# Altium PCB I-V E9A_05_6231.PcbDoc
Units mil, origin at the board's own origin, x right, y up, seen from the top; angles counter-clockwise.
Board outline 6000 x 4000 mil, 2 copper layers (Top Layer, Bottom Layer); 21 components, 16 nets, 67 pads, 0 vias.
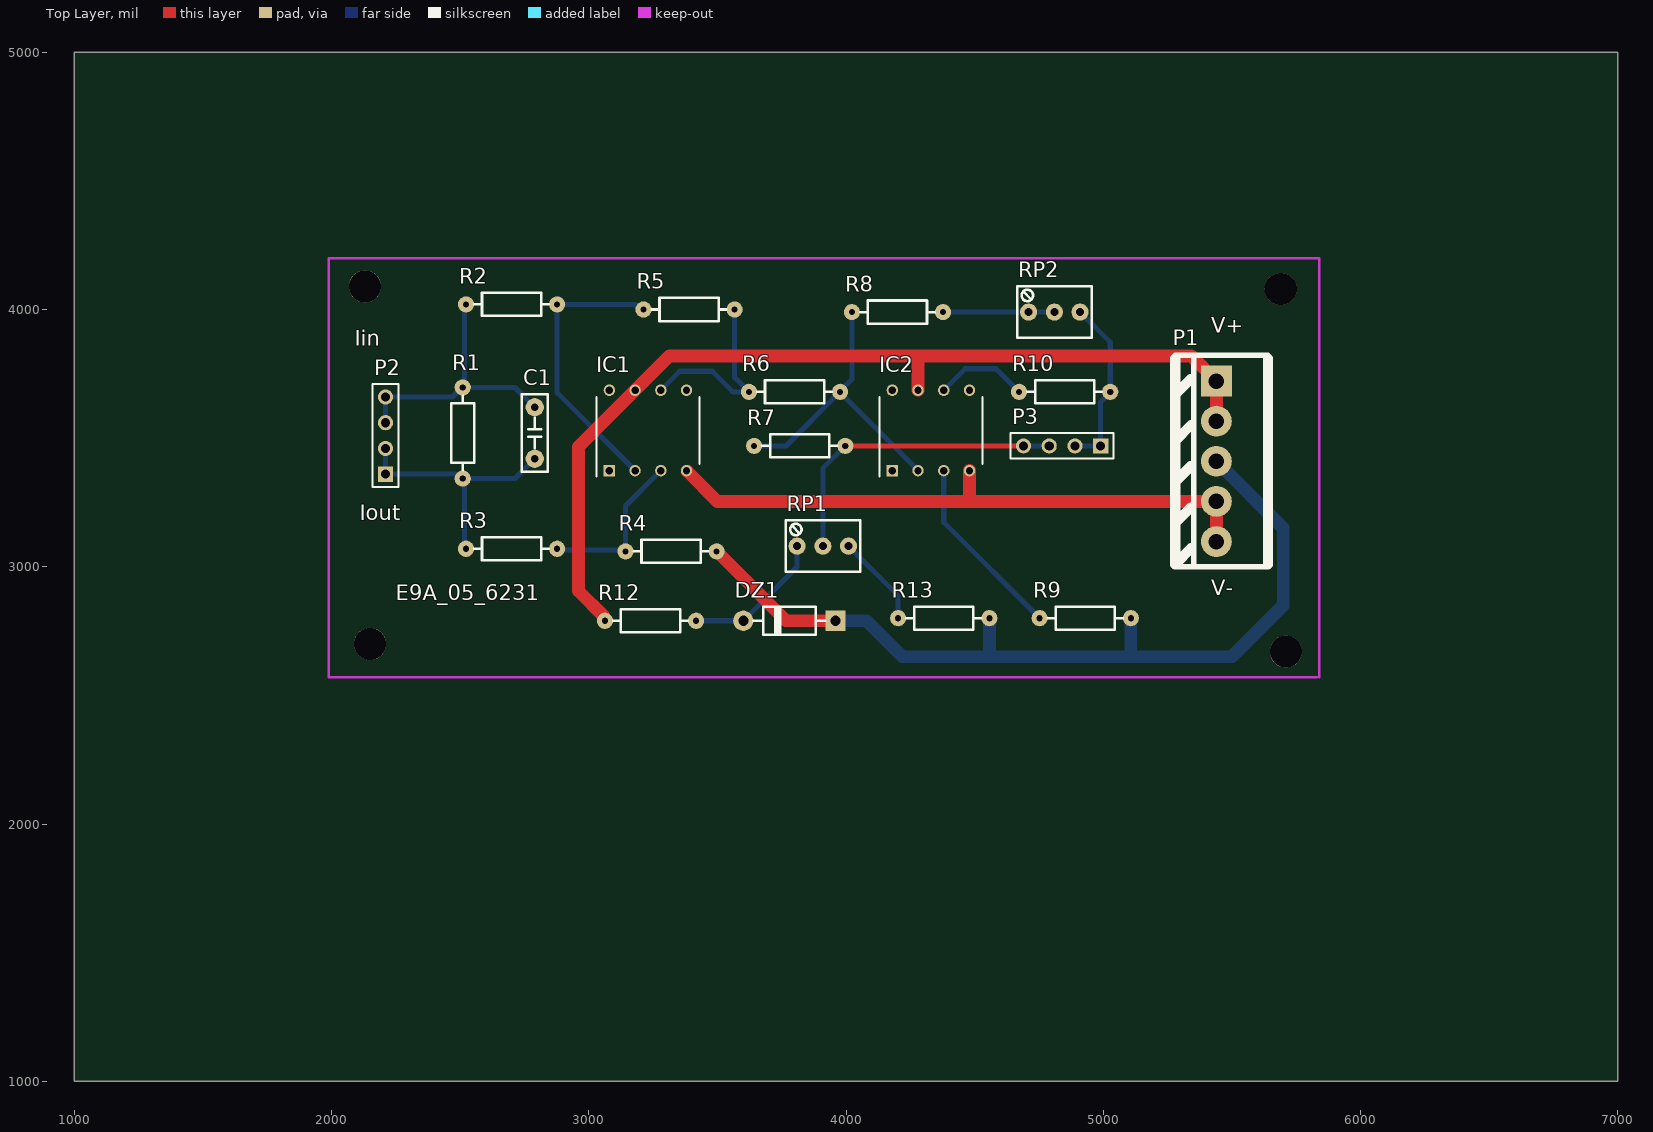
[diagram p0: Top Layer view]
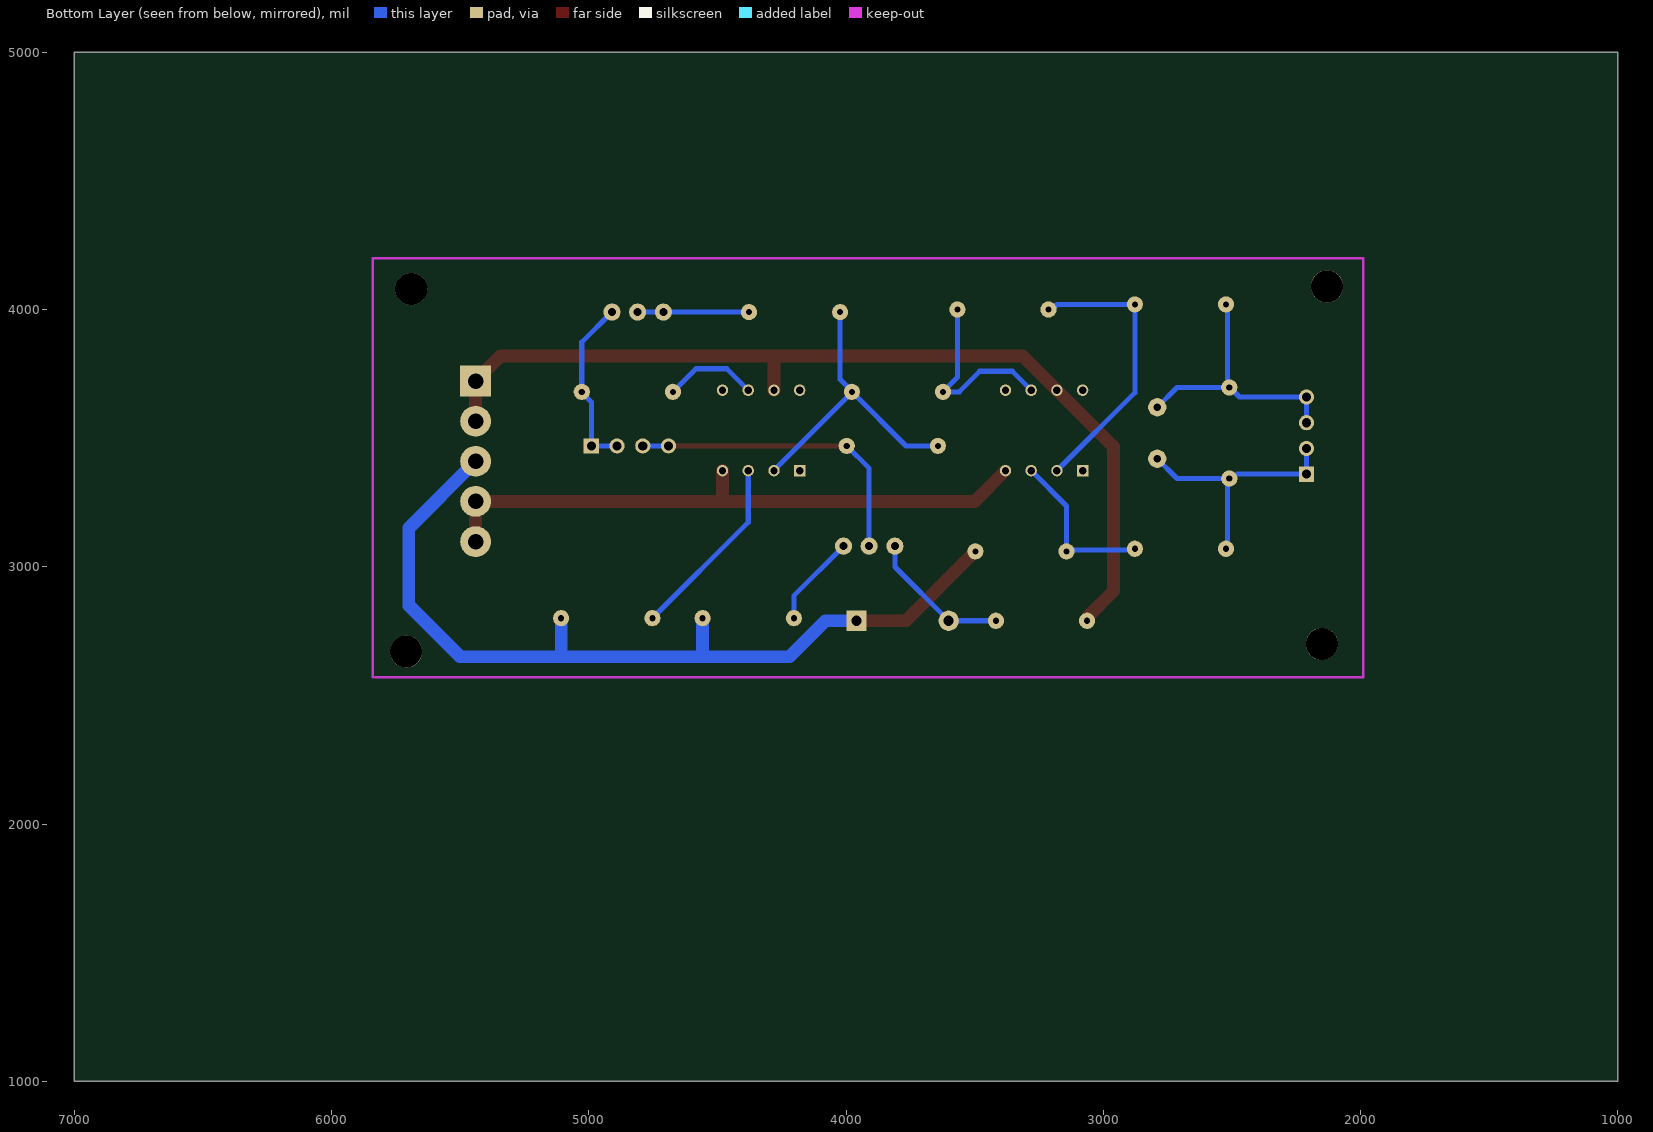
[diagram p1: Bottom Layer view, seen from below]
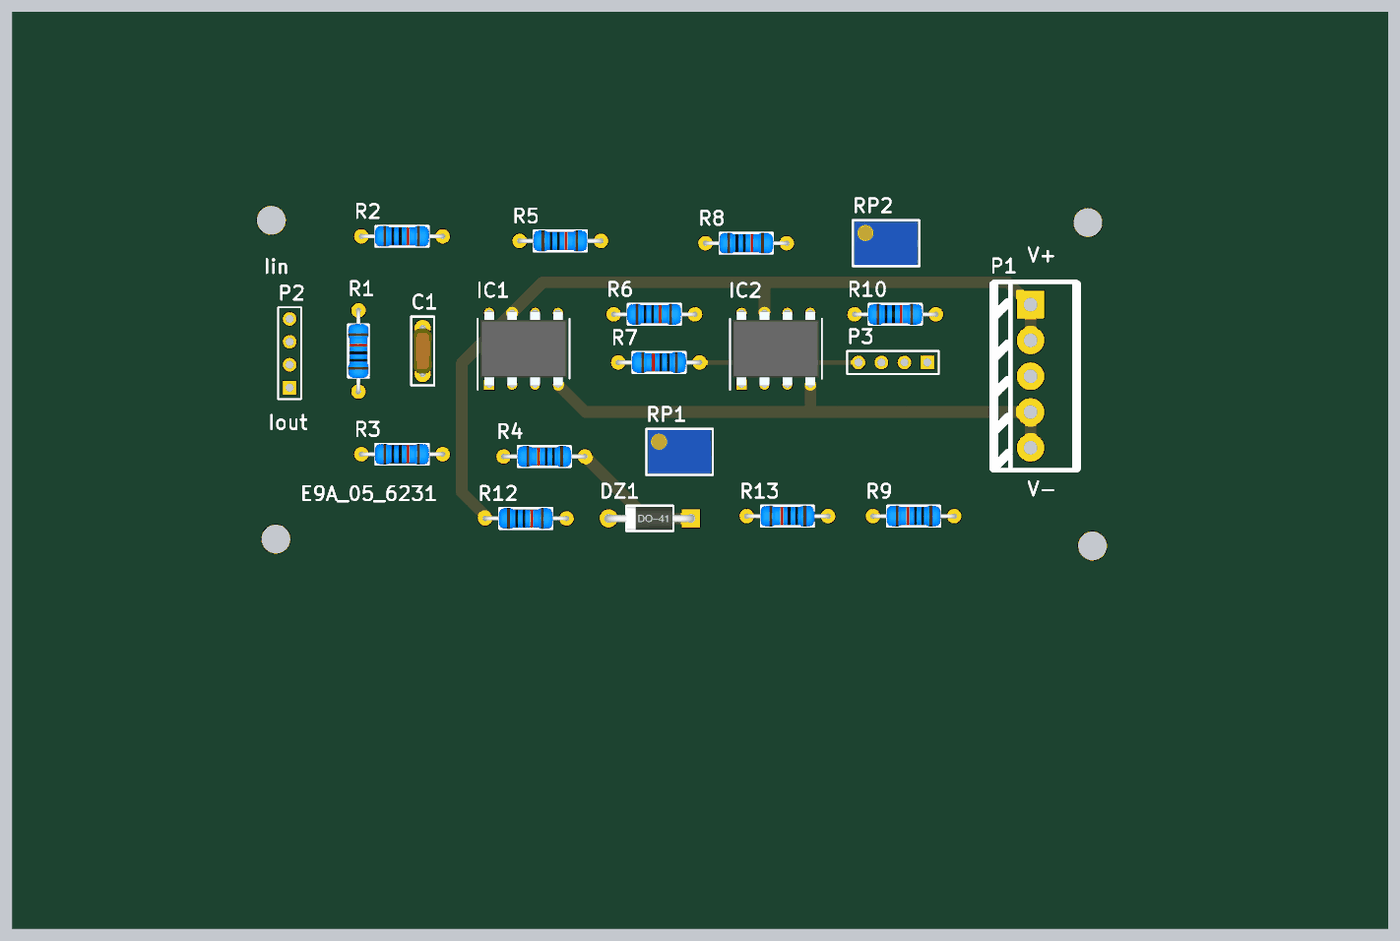
[diagram p2: 3D render of the assembled board from above, using the file's embedded part models]

## Layer stack, top to bottom
Top Solder: solder mask 0.4, Solder Resist, Dk 3.5
Top Layer: signal copper 1.4
Dielectric 1: dielectric 12.6, FR-4, Dk 4.8
Bottom Layer: signal copper 1.4
Bottom Solder: solder mask 0.4, Solder Resist, Dk 3.5

## Board outline
1000,1000 7000,1000 7000,5000 1000,5000

## Design rules (kind name [scope] priority, off if disabled: settings)
Clearance [All] p1: gap=10 ignorepadtopadclearanceinfootprint=FALSE except(0: Arc-Hole Track-Hole SMDPad-Hole THPad-Hole Via-Hole Fill-Hole Poly-Hole Region-Hole Text-Hole)
PolygonConnect [All] p1: connectstyle=Relief reliefconductorwidth=10 reliefentries=4 polygonreliefangle="90 Angle" airgapwidth=10
RoutingVias [All] p1: holewidth=28 width=50 viastyle="Through Hole" minholewidth=28 minwidth=50 maxholewidth=28 maxwidth=50
SolderMaskExpansion [All] p1: expansion=4 istentingtop=FALSE
Width [All] p1: maxlimit=50 minlimit=10 preferedwidth=15 minimp=50.000000 maximp=50.000000 favimp=50.000000
30 further rules are at their usual default settings.

## Components (designator, comment, footprint, x,y, rotation, side; value= is the part's Value field where it differs from the comment)
C1 "224" MLCC5.08-A 2790,3520 r90 top
DZ1 "1N4733" DO-41 3780,2790 r180 top
IC1 "OP07CP+" DIP794W53P254L959H508Q8N 3230,3530 r90 top
IC2 "OP07CP+" DIP794W53P254L959H508Q8N 4330,3530 r90 top
P1 "Header 5" "POWER PLUG5" 5440,3722 r90 top
P2 "Header 4" HDR1X4 2210,3360 r90 top
P3 "Header 4" HDR1X4 4990,3470 r180 top
R1 "1K" "RS 1/4W" 2510,3520 r90 top
R2 "1K" "RS 1/4W" 2700,4020 r0 top
R3 "1K" "RS 1/4W" 2700,3070 r0 top
R4 "1K" "RS 1/4W" 3320,3060 r180 top
R5 "1K" "RS 1/4W" 3390,4000 r0 top
R6 "1K" "RS 1/4W" 3800,3680 r0 top
R7 "1K" "RS 1/4W" 3820,3470 r180 top
R8 "1K" "RS 1/4W" 4200,3990 r0 top
R9 "1K" "RS 1/4W" 4930,2800 r180 top
R10 "1K" "RS 1/4W" 4850,3680 r0 top
R12 "1K" "RS 1/4W" 3240,2790 r0 top
R13 "1K" "RS 1/4W" 4380,2800 r180 top
RP1 "10K" 3266Y 3910,3080 r0 top
RP2 "12K" 3266Y 4810,3990 r0 top

## Footprints (in the part's own frame and the unit in brackets; to place one, negate y for a bottom-side part, rotate by r counter-clockwise, add the part's x,y. Pads: shape width x height; smd on the part's side, far side on the other; paste and mask are expansions set on the pad)
3266Y [mm] "长：7mm，宽：4.8mm，高：7.5mm"
  round 1.7 hole 0.8: 1(-2.54,0) 2(0,0) 3(2.54,0)
  silkscreen extent -3.68,-2.54 3.68,2.54, body extent -3.5,-2.4 3.5,2.4, height 8.03
DIP794W53P254L959H508Q8N [mm]
  rect 1.13x1.13 hole 0.73: 1(-3.97,3.81)
  round 1.13 hole 0.73: 2(-3.97,1.27) 3(-3.97,-1.27) 4(-3.97,-3.81) 5(3.97,-3.81) 6(3.97,-1.27) 7(3.97,1.27) 8(3.97,3.81)
  silkscreen extent -4.53,-5.08 3.3,5.08, body extent -4.1,-4.79 4.1,4.79, height 5.08
DO-41 [mm] "2.6*9.1mm(直径，脚距）"
  rect 2x2 hole 1: 1(-4.55,0)
  round 2 hole 1: 2(4.55,0)
  silkscreen extent -3.56,-1.4 3.56,1.4, body extent -4.92,-1.29 4.98,1.31, height 2.65
HDR1X4 [mm] "Connector; Header; 4 Position"
  rect 1.5x1.5 hole 0.9: 1(0,0)
  round 1.5 hole 0.9: 2(2.54,0) 3(5.08,0) 4(7.62,0)
  silkscreen extent -1.27,-1.27 8.89,1.27
MLCC5.08-A [mm] "独石电容，脚距5.08mm"
  round 1.8 hole 0.7: 1(-2.54,0) 2(2.54,0)
  silkscreen extent -3.81,-1.27 3.81,1.27, body extent -2.79,-1 2.79,1, height 3.71
"POWER PLUG5" [mil] "双电源插座"
  rect 120x120 hole 60: 1(0,0)
  round 120 hole 60: 2(-156,0) 3(-312,0) 4(-468,0) 5(-624,0)
  silkscreen extent -722,-200 100,160
"RS 1/4W" [mm] "直插色环电阻，脚距9mm，直径2.3mm"
  round 1.6 hole 0.6: 1(-4.5,0) 2(4.5,0)
  silkscreen extent -3.68,-1.14 3.68,1.14, body extent -4.72,-1.16 4.73,1.16, height 2.32

## Part data
C1: library part C-MLCC, "独石电容", BOM名称=独石电容, 学习资源=www.ooocke.com, 版权归属=源创客
DZ1: "5.1V/1W稳压管", BOM名称=5.1V/1W稳压管, 学习资源=www.ooocke.com, 版权归属=源创客
IC1 IC2: "Integrated Circuit", Manufacturer_Name="Texas Instruments", Mouser Part Number=N/A, Height=5.08mm, Manufacturer_Part_Number=OP07CP+, Mouser Price/Stock=https://www.mouser.co.uk/ProductDetail/Texas-Instruments/OP07CP%2b?qs=iZ8gpeFYjbuxAroH12iSPg%3D%3D
P1: "Header, 5-Pin", LatestRevisionDate=17-Jul-2002, LatestRevisionNote="Re-released for DXP Platform.", Publisher="Altium Limited"
P2 P3: "Header, 4-Pin", LatestRevisionDate=17-Jul-2002, LatestRevisionNote="Re-released for DXP Platform.", Publisher="Altium Limited"
R1 R2 R3 R4 R5 R6 R7 R8 R9 R10 R12 R13: library part R-CRR, "直插色环电阻", BOM名称=色环电阻, 学习资源=www.ooocke.com, 版权归属=源创客
RP1 RP2: library part RP-ID, "插件单联电位器", BOM名称=插件电位器, 学习资源=www.ooocke.com, 版权归属=源创客

## Free pads (board coordinates)
  round 125 hole 125: 9(2130,4090) 9(2150,2700) 9(5690,4080) 9(5710,2670)

## Nets (pads, with @x,y where several pads share a name; then routed paths per layer and width w, separated by ;. In a path a pad name is that pad's centre, name@x,y a point inside that pad or via, vN(x,y) a via of type N, cw(c..) or ccw(c..) an arc to the next point about the centre after c; other vN are vias at no path point)
GND: DZ1.1 P1.3 R4.1 R9.1 R13.1 | length 3424.4
  Top Layer w50: R4.1@3500,3060 3500,3057.17 3767.17,2790 DZ1.1
  Bottom Layer w20: 4557.17,2652.83 4560,2650 ; 5107.17,2652.83 5110,2650
  Bottom Layer w50: DZ1.1 4080,2790 4220,2650 4560,2650 5110,2650 5500,2650 5700,2850 5700,3150 P1.3 ; 4557.17,2652.83 R13.1 ; 5107.17,2652.83 R9.1
NetC1_1: C1.1 P2.1 P2.2 R1.1 R3.1 | length 987.1
  Bottom Layer w20: P2.2 P2.1 2479.85,3360 R1.1@2499.85,3340 ; R3.1@2520,3070 2516.42,3073.58 2516.42,3336.42 R1.1 2712.83,3342.83 C1.1
NetC1_2: C1.2 P2.3 P2.4 R1.2 R2.1 | length 1052.1
  Bottom Layer w20: P2.3 P2.4 2470.8,3660 R1.2@2508.98,3698.18 ; R1.2 2712.83,3697.17 C1.2 ; R1.2@2510,3700 2516.42,3706.42 2516.42,4013.58 R2.1
NetDZ1_2: DZ1.2 R12.2 RP1.1 | length 558.4
  Top Layer w20: DZ1.2@3600,2790 DZ1.2
  Bottom Layer w20: R12.2@3420,2790 DZ1.2 3810,2999.13 RP1.1
NetIC1_2: IC1.2 R2.2 R5.1 | length 1110.2
  Bottom Layer w20: IC1.2@3180,3380 3173.7,3380 2877.17,3676.54 R2.2 3179.85,4020 3199.85,4000 R5.1@3210,4000
NetIC1_3: IC1.3 R3.2 R4.2 | length 628.9
  Bottom Layer w20: R3.2 2882.17,3065 R4.2@3135,3065 ; R4.2 3142.83,3236.54 3276.3,3370 IC1.3@3280,3370
NetIC1_4: IC1.4 IC2.4 P1.4 P1.5 | length 2375.7
  Top Layer w20: IC1.4@3380,3370 IC1.4@3383.7,3370
  Top Layer w50: IC1.4@3383.7,3370 3499.7,3254 P1.4 P1.5@5440,3100 ; 4480,3260 IC2.4
NetIC1_6: IC1.6 R5.2 R6.1 | length 746.9
  Bottom Layer w20: IC1.6@3280,3690 3283.7,3690 3353.7,3760 3480,3760 3560,3680 R6.1@3620,3680 ; R5.2 3567.17,3735.67 3620,3682.83 R6.1@3620,3680 ; R6.1 R6.1@3620,3680
NetIC1_7: IC1.7 IC2.7 P1.1 P1.2 R12.1 | length 3675.3
  Top Layer w20: R12.1@3060,2790 R12.1@3060,2805.82 ; P1.2@5440,3560 P1.2
  Top Layer w50: R12.1@3060,2805.82 2960,2905.82 2960,3466.3 IC1.7 ; IC1.7@3183.7,3690 3313.7,3820 4280,3820 ; IC2.7 4280,3820 ; P1.2 P1.1 5342,3820 4280,3820
NetIC2_2: IC2.2 R6.2 R7.2 R8.1 | length 1196.1
  Bottom Layer w20: R7.2@3630,3470 R7.2 3767.17,3470 R6.2 ; R8.1@4020,3990 4022.83,3987.17 4022.83,3729.06 3977.17,3683.39 R6.2 ; IC2.2@4280,3370 IC2.2 ; IC2.2@4280,3380 4275.43,3380 3977.17,3678.27 R6.2
NetIC2_3: IC2.3 R9.2 | length 729.8
  Top Layer w20: R9.2@4750,2800 R9.2@4750,2802.83
  Bottom Layer w20: IC2.3 4380,3172.83 4750,2802.83 R9.2@4750,2800
NetIC2_6: IC2.6 R10.1 | length 367
  Bottom Layer w20: IC2.6 4380,3690 4383.7,3690 4463.7,3770 4582.83,3770 R10.1
NetP3_1: P3.1 P3.2 R10.2 RP2.3 | length 686.7
  Bottom Layer w20: P3.2 P3.1 4990,3640.8 5029.2,3680 5030,3680 5027.17,3682.83 5027.17,3872.83 RP2.3
NetP3_3: P3.3 P3.4 R7.1 RP1.2 | length 1216.1
  Top Layer w20: R7.1@4000,3470 P3.4
  Bottom Layer w20: RP1.2 3910,3382.83 R7.1 ; P3.4 P3.3
NetR8_2: R8.2 RP2.1 RP2.2 | length 432.8
  Bottom Layer w20: R8.2 RP2.1 RP2.2
NetR13_2: R13.2 RP1.3 | length 359.9
  Bottom Layer w20: RP1.3 4202.83,2887.17 R13.2
pads on no net: IC1.1 IC1.5 IC1.8 IC2.1 IC2.5 IC2.8

## Keep-outs
Keep-Out Layer:
  lines w10: 5830,2570 1990,2570 1990,4200 5840,4200 5840,2570

## Silkscreen, mask and mechanical layers (free items; w line width, h text height)
Top Overlay:
  text "V+" at 5420,3910 h60
  text "Iin" at 2090,3860 h60
  text "Iout" at 2110,3180 h60
  text "V-" at 5420,2890 h60
  text "E9A_05_6231" at 2250,2870 h60